# EAGLE board GPS_radiologger_v3 (EAGLE 9.5.1)
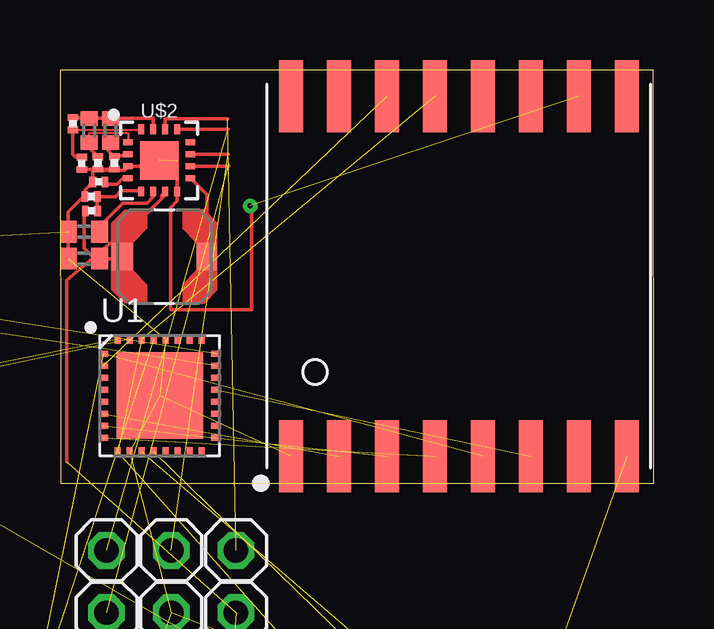
[diagram p0: board, top side]
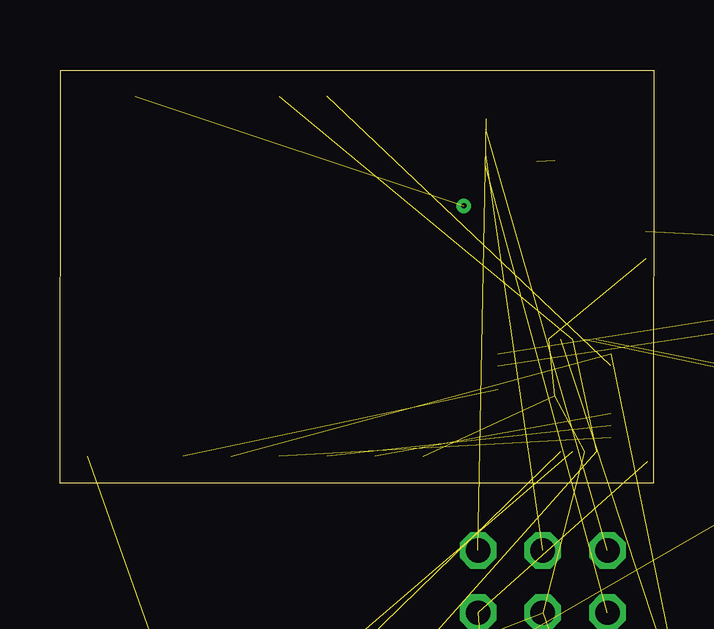
[diagram p1: board, bottom side, seen from below]

Size 24.77 x 17.21 mm. Coordinates in mm from the lower left corner, seen from the top.
Outline: 0.04,0 24.77,0 24.74,17.21 0,17.21 0.04,0
Copper layers (1*16): Top 0.035mm / dielectric 1.5mm / Bottom 0.035mm
Design rules "default": minimum track width 6mil, minimum drill 0.35mm, track to track 6mil, track to pad 6mil, pad to pad 6mil, via to via 6mil, smd to smd 6mil, copper to edge 40mil, drill to drill 6mil, minimum pad ring 10mil, minimum via ring 8mil, stop-mask expansion 4mil, vias tented up to drill 0mil, thermal gap 10mil
Net classes: 0 default: width 0 mm, drill 0 mm; 1 vcc: width 0 mm

## Footprints (pad centres in the part's own frame; a part is rotated, then mirrored left to right if it is on the bottom)
C0402 = smd 0.7 x 0.9: 1 -0.65,0; 2 0.65,0
C0201 = smd 0.25 x 0.35: 1 -0.25,0; 2 0.25,0
0603 = smd 1.1 x 1: 1 -0.85,0; 2 0.85,0
0402 = smd 0.85 x 0.9: 1 -0.58,0; 2 0.58,0
SOD-323 = smd 0.63 x 0.83: A 1.15,0; C -1.15,0
1X04_1.27MM_NO_SILK = drill 0.508 pad 1: 1 0,0; 2 1.27,0; 3 2.54,0; 4 3.81,0
USB-MICROB-PTH-MILL = smd 0.4 x 1.75: D+ 0,0; D- -0.65,0; GND 1.3,0; ID 0.65,0; VBUS -1.3,0 | smd 2 x 1.46: SHIELD -2.9,0.275; SHIELD2 2.9,0.275 | smd 1.425 x 2.5: SHIELD3 -0.963,-2.675; SHIELD4 0.963,-2.675 | smd 1.4 x 2.1 bottom: SHIELD5 -2.731,-2.531; SHIELD7 2.729,-2.531 | smd 1 x 1: SHIELD6 2.7,-2.575 | smd 1.1 x 1.5: SHIELD8 -2.731,-2.731 | smd 1 x 1.3 bottom: SHIELD9 -2.43,0.195; SHIELD10 2.43,0.195
1X01 = drill 1.016 octagon: 1 0,0
IND_LPS4012-103MRB = smd 0.87 x 1.15: 1 -1.765,0; 2 1.765,0
0806 = smd 0.8 x 1.8: 1 -1.3,0; 2 0.5,0
SOT23-3 = smd 0.8 x 0.9: 1 -0.95,-1; 2 0.95,-1; 3 0,1.1
R0201 = smd 0.28 x 0.43: 1 -0.255,0; 2 0.255,0
R0402 = smd 0.6 x 0.7: 1 -0.5,0; 2 0.5,0
QFN-32_SAMD = smd 0.25 x 0.4: GND 0.21,2.31; GNDANA -1.29,-2.39; PA08 -0.79,-2.39; PA09 -0.29,-2.39; PA10 0.21,-2.39; PA11 0.71,-2.39; PA14 1.21,-2.39; PA15 1.71,-2.39; PA27 1.71,2.31; PA28 0.71,2.31; PA30 -1.29,2.31; PA31 -1.79,2.31; RES 1.21,2.31; VDD -1.79,-2.39; VDDCORE -0.29,2.31; VDDIN -0.79,2.31 | smd 0.4 x 0.25: PA00 -2.39,1.71; PA01 -2.39,1.21; PA02 -2.39,0.71; PA03 -2.39,0.21; PA04 -2.39,-0.29; PA05 -2.39,-0.79; PA06 -2.39,-1.29; PA07 -2.39,-1.79; PA16 2.31,-1.79; PA17 2.31,-1.29; PA18 2.31,-0.79; PA19 2.31,-0.29; PA22 2.31,0.21; PA23 2.31,0.71; PA24 2.31,1.21; PA25 2.31,1.71 | smd 3.6 x 3.6: PAD -0.04,-0.04
UBLOX_ZOE_M8-0-10 = smd 0.25 x 0.25: 1 -1.996,2.004; 2 -1.496,2.004; 3 -0.996,2.004; 4 -0.496,2.004; 5 0.004,2.004; 6 0.504,2.004; 7 1.004,2.004; 8 1.504,2.004; 9 2.004,2.004; 10 2.004,1.504; 11 2.004,1.004; 12 2.004,0.504; 13 2.004,0.004; 14 2.004,-0.496; 15 2.004,-0.996; 16 2.004,-1.496; 17 2.004,-1.996; 18 1.504,-1.996; 19 1.004,-1.996; 20 0.504,-1.996; 21 0.004,-1.996; 22 -0.496,-1.996; 23 -0.996,-1.996; 24 -1.496,-1.996; 25 -1.996,-1.996; 26 -1.996,-1.496; 27 -1.996,-0.996; 28 -1.996,-0.496; 29 -1.996,0.004; 30 -1.996,0.504; 31 -1.996,1.004; 32 -1.996,1.504; 33 -0.996,1.004; 34 -0.496,1.004; 35 0.004,1.004; 36 0.504,1.004; 37 1.004,1.004; 38 1.004,0.004; 39 1.004,-0.496; 40 1.004,-0.996; 41 0.504,-0.996; 42 0.004,-0.996; 43 -0.496,-0.996; 44 -0.996,-0.996; 45 -0.996,-0.496; 46 -0.996,0.004; 47 -0.996,0.504; 48 -0.496,0.504; 49 0.504,0.504; 50 0.504,-0.496; 51 -0.496,-0.496
SOT23-6 = smd 0.55 x 1.35: 1 -0.95,-1.375; 2 0,-1.375; 3 0.95,-1.375; 4 0.95,1.375; 5 0,1.375; 6 -0.95,1.375
RFM95/96/97/98W = smd 3 x 1: 3.3V 7.5,1; !RESET -7.5,-3; ANT 7.5,-7; DIO0 7.5,3; DIO1 7.5,5; DIO2 7.5,7; DIO3 7.5,-3; DIO4 7.5,-1; DIO5 -7.5,-5; GND@1 -7.5,7; GND@2 -7.5,-7; GND@3 7.5,-5; MISO -7.5,5; MOSI -7.5,3; NSS -7.5,-1; SCK -7.5,1
SOT23-5 = smd 0.55 x 1.2: 1 -0.95,-1.3; 2 0,-1.3; 3 0.95,-1.3; 4 0.95,1.3; 5 -0.95,1.3
LFCSP-16-3X3 = smd 0.4 x 0.25: 1 -1.3,0.75; 2 -1.3,0.25; 3 -1.3,-0.25; 4 -1.3,-0.75; 9 1.3,-0.75; 10 1.3,-0.25; 11 1.3,0.25; 12 1.3,0.75 | smd 0.25 x 0.4: 5 -0.75,-1.3; 6 -0.25,-1.3; 7 0.25,-1.3; 8 0.75,-1.3; 13 0.75,1.3; 14 0.25,1.3; 15 -0.25,1.3; 16 -0.75,1.3 | smd 1.6 x 1.6: EXP 0,0
CRYSTAL-SMD-3.2X1.5MM = smd 1 x 1.8: P$1 -1.25,0; P$2 1.25,0
W3011 = smd 0.8 x 0.65: 1 1.6,0.475; 2 1.6,-0.475 | smd 0.8 x 1.6: 3 -1.6,0

## Placement (x,y rotation side)
C1  4.7uF  [C0402]  1,9.35 180 top
C2  10uF  [C0402]  1,10.47 180 top
C3  10 uF  [C0201]  -6.38,-21.09 0 top  (outside the outline)
C4  10 uF  [C0201]  -6.38,-25.97 0 top  (outside the outline)
C5  4.7uF  [0603]  -7.24,-71.59 0 top  (outside the outline)
C6  0.1uF  [0603]  -14.81,-75.45 0 top  (outside the outline)
C7  10uF  [0603]  4.07,-54.65 0 top  (outside the outline)
C8  1.0uF  [0402]  7,-54.65 0 top  (outside the outline)
D1  1A/23V/620mV  [SOD-323]  -0.94,-54.65 0 top  (outside the outline)
J4  [1X04_1.27MM_NO_SILK]  -10.21,2.7 180 top  (outside the outline)
J5  [USB-MICROB-PTH-MILL]  -15.33,8.82 90 top  (outside the outline)
JP1  [1X01]  1.94,-2.8 0 top
JP2  [1X01]  4.64,-2.8 0 top
JP3  [1X01]  7.34,-2.8 0 top
JP4  [1X01]  1.94,-5.4 0 top  (outside the outline)
JP5  [1X01]  4.64,-5.4 0 top  (outside the outline)
JP6  [1X01]  7.34,-5.4 0 top  (outside the outline)
L1  22 uH  [IND_LPS4012-103MRB]  4.36,9.44 0 top
L2  2.2uH  [0806]  -14.63,-71.75 0 top  (outside the outline)
Q1  1.1A/60V/600mΩ  [SOT23-3]  0.01,-10.53 0 top  (outside the outline)
Q2  3.1A/30V/105mΩ  [SOT23-3]  3.63,-40.53 0 top  (outside the outline)
R1  6.34M  [R0201]  1.32,11.34 180 top
R2  14.7M  [R0201]  1.3,11.94 0 top
R3  20k  [R0201]  1.62,12.55 0 top
R4  10k  [0402]  -6.3,-59.4 0 top  (outside the outline)
R5  10k  [R0201]  -15.29,-79.49 0 top  (outside the outline)
RPG1  [R0201]  0.54,14.98 90 top
RPG2  [R0201]  0.91,13.33 90 top
RSD1  [R0402]  1.21,14.69 90 top
RSD2  [R0201]  1.58,13.34 90 top
RTERM1  [R0402]  2.12,14.69 90 top
RTERM2  [R0201]  2.27,13.34 90 top
U1  ATSAMD21E18A-U  [QFN-32_SAMD]  4.2,3.69 0 top
U2  UBLOX_ZOE_M8-0-10  [UBLOX_ZOE_M8-0-10]  17.78,-11.73 0 top  (outside the outline)
U3  TPL5110  [SOT23-6]  0.26,-16.47 0 top  (outside the outline)
U4  RFM95W  [RFM95/96/97/98W]  16.63,8.63 90 top
U5  3.3V  [SOT23-5]  -5.8,-55.73 0 top  (outside the outline)
U$2  ADP5090  [LFCSP-16-3X3]  4.14,13.44 0 top
Y1  32.768kHz  [CRYSTAL-SMD-3.2X1.5MM]  -11.24,-71.88 0 top  (outside the outline)
Y2  W3011  [W3011]  -5.7,16.61 180 top  (outside the outline)

## Library data of the parts
C1 C2 R1-R3 RPG1 RPG2 RSD2 RTERM2 = resistor
C3 C4 = rcl; SPICEPREFIX: C
C5 = SparkFun-Capacitors; PROD_ID: CAP-08280
C6 = SparkFun-Capacitors; PROD_ID: CAP-00810
C7 = SparkFun-Capacitors; PROD_ID: CAP-11015
C8 = SparkFun-Capacitors; PROD_ID: CAP-12417
D1 = SparkFun-DiscreteSemi; PROD_ID: DIO-11623
J4 = SparkFun-Connectors
J5 = SparkFun-Connectors; PROD_ID: CONN-13711
JP1-JP6 = pinhead
L1 = LPS4012-103MRB; AVAILABILITY: Unavailable; DESCRIPTION: Power inductor, shielded, 20/30% tol, SMT, RoHS, lead-free, halogen-free; MF: Coilcraft; MP: LPS4012-103MRB; PACKAGE: None; PRICE: None
L2 = SparkFun-Coils; PROD_ID: NDUC-14257
Q1 = SparkFun-DiscreteSemi; PROD_ID: TRANS-08285
Q2 = SparkFun-DiscreteSemi; PROD_ID: TRANS-11308
R4 = SparkFun-Resistors; PROD_ID: RES-14241
R5 RSD1 RTERM1 = rcl; SPICEPREFIX: R
U1 = SparkFun-IC-Microcontroller; PROD_ID: IC-14428
U2 = SparkFun-GPS; PROD_ID: IC-14251
U3 = SparkFun-IC-Power; PROD_ID: IC-14387
U4 = SparkFun-RF; PROD_ID: IC-13959
U5 = SparkFun-IC-Power; PROD_ID: VREG-12457
U$2 = ADP5090_LFCSP-16-3X3
Y1 = SparkFun-Clocks; PROD_ID: XTAL-13062
Y2 = SparkFun-GPS; PROD_ID: ANT-14304

## Nets
3.3V: C3.1 C6.1 C7.1 C8.1 R5.2 U1.VDD U1.VDDIN U2.24 U2.25 U4.3.3V U5.5
!INT: U2.43
!RESET: J4.1 U2.20
!SAFEBOOT: U2.34
ANT: U2.4
BAT: JP4.1 U$2.10
D7: U1.PA04
D13: U1.PA10
D+: J5.D+ U1.PA25
D-: J5.D- U1.PA24
D_SEL: U2.48
DAC: U1.PA02
DELAY/M_DRIVE: U3.3
DIS_SW: JP3.1 U$2.14
DONE: U3.4
DRIVE: Q1.1 U3.5
FLASH_CS: U1.PA19
FLASH_MISO: U1.PA18
FLASH_MOSI: U1.PA16
FLASH_SCK: U1.PA17
GND: C1.2 C2.2 C3.2 C4.2 C5.2 C6.2 C7.2 C8.2 J4.2 J5.GND J5.SHIELD J5.SHIELD2 J5.SHIELD3 J5.SHIELD4 J5.SHIELD5 J5.SHIELD6 J5.SHIELD7 J5.SHIELD8 J5.SHIELD9 J5.SHIELD10 JP5.1 R2.1 R3.1 R4.1 RPG2.1 RSD2.1 RTERM2.1 U1.GND U1.GNDANA U1.PAD U2.1 U2.3 U2.5 U2.7 U2.8 U2.9 U2.10 U2.11 U2.12 U2.17 U2.23 U2.29 U2.31 U2.37 U2.38 U2.39 U2.40 U2.41 U2.44 U2.46 U2.47 U2.49 U3.2 U4.GND@1 U4.GND@2 U4.GND@3 U5.2 U$2.3 U$2.8 U$2.EXP
MISO: U1.PA05 U4.MISO
MOSI: U1.PA06 U4.MOSI
N$1: R1.1 R2.2 U$2.5
N$2: C2.1 U$2.6
N$3: L1.2 U$2.9
N$4: L2.2 U2.26
N$5: R3.2 U$2.4
N$6: U3.1 U3.6
N$7: RTERM1.1 RTERM2.2 U$2.2
N$8: RPG1.1 RPG2.2 U$2.16
N$9: RSD1.1 RSD2.2 U$2.1
N$10: C4.1 U1.VDDCORE
N$11: RPG1.2 RSD1.2 RTERM1.2 U$2.15
N$13: C5.1 L2.1 U2.27
N$14: U2.18 Y1.P$2
N$15: U2.19 Y1.P$1
PGOOD: JP1.1 U$2.13
RESET: U1.RES
RFM_ANT: U4.ANT
RFM_CS: R5.1 U1.PA00 U4.NSS
RFM_INT: U1.PA01 U4.DIO0
RFM_RST: U1.PA22 U4.!RESET
RX: U1.PA23
RXI/MOSI: U2.22
SCK: U1.PA07 U4.SCK
SCL: U1.PA09 U2.32
SDA: U1.PA08 U2.2
SWCLK: J4.3 U1.PA30
SWDIO: J4.4 U1.PA31
SYS: JP2.1 U$2.11
TIMEPULSE: U2.33
TXO/MISO: U2.21
V_BATT: Q2.3 U2.16
V_USB: D1.A J5.VBUS Q2.1 R4.2
VDD: Q1.2
VDD_OUT: Q1.3
VIN: C1.1 D1.C JP6.1 L1.1 Q2.2 R1.2 U5.1 U5.3 U$2.7

## Tracks (layer width: path | path; a pad name or v marks a point on that pad's centre or on a via)
3.3V  (10 unrouted)
!RESET  (1 unrouted)
BAT  (1 unrouted)
  Top 0.152: U$2.10 7.04,13.19 7.04,13.24
D+  (1 unrouted)
D-  (1 unrouted)
DIS_SW  (1 unrouted)
  Top 0.152: U$2.14 4.39,15.17 6.99,15.17
DRIVE  (1 unrouted)
GND  (via drill 0.2)  (34 unrouted)
  Top 0.152: 4.89,13.41 U$2.8 4.89,11.76 4.61,11.48 4.61,7.22 7.98,7.22 7.98,11.55 v7.93,11.55 | U$2.EXP 4.42,13.44 4.42,13.19 U$2.3 2.69,13.05 1.34,13.05 1.3,13.09 RTERM2.1 2.25,13.07 RPG2.1 | C1.2 C2.2 0.35,11.32 0.96,11.93 0.98,11.93 0.99,11.94 R2.1 1.04,12.23 R3.1 1.36,13.07 RPG2.1 | RSD2.1 1.57,13.07 RPG2.1
MISO  (1 unrouted)
MOSI  (1 unrouted)
N$1
  Top 0.152: U$2.5 3.36,12.17 2.56,12.17 2.32,11.94 R2.2 1.55,11.36 R1.1
N$2
  Top 0.152: U$2.6 3.89,11.93 3.63,11.66 2.61,11.66 1.65,10.7 C2.1
N$3
  Top 0.152: U$2.9 6.12,12.01 L1.2
N$4  (1 unrouted)
N$5
  Top 0.152: R3.2 1.97,12.46 2.39,12.46 2.62,12.69 U$2.4
N$6  (1 unrouted)
N$7
  Top 0.152: U$2.2 2.66,13.69 2.62,13.65 2.32,13.65 RTERM2.2 2.02,13.85 2.02,14.09 RTERM1.1
N$8
  Top 0.076: RPG1.1 3.39,14.72
  Top 0.152: RPG1.1 0.54,13.69 0.64,13.59 0.9,13.59 RPG2.2 | 3.39,14.72 U$2.16
N$9
  Top 0.076: RSD1.1 1.21,14.59 2.84,14.59 U$2.1
  Top 0.152: RSD1.1 1.19,14.17 1.19,13.99 RSD2.2
N$10  (1 unrouted)
N$11
  Top 0.152: 2.11,14.95 RTERM1.2 | 0.59,15.18 RPG1.2 1.21,15.23 RSD1.2 RTERM1.2 | RTERM1.2 2.15,15.21 3,15.21 | 3,15.21 3,15.22 | 3,15.21 3.89,15.21 U$2.15 | RTERM1.2
N$13  (2 unrouted)
N$14  (1 unrouted)
N$15  (1 unrouted)
PGOOD  (1 unrouted)
  Top 0.152: U$2.13 7.01,14.74 | 7.01,14.74
RFM_CS  (2 unrouted)
RFM_INT  (1 unrouted)
RFM_RST  (1 unrouted)
SCK  (1 unrouted)
SCL  (1 unrouted)
SDA  (1 unrouted)
SWCLK  (1 unrouted)
SWDIO  (1 unrouted)
SYS  (1 unrouted)
  Top 0.152: U$2.11 7.01,13.69 7.01,13.7
V_BATT  (1 unrouted)
V_USB  (3 unrouted)
VIN  (5 unrouted)
  Top 0.152: 2.6,10.59 L1.1 | L1.1 2.6,8.19 | L1.1 2.6,10.2 4.24,11.85 4.24,12 U$2.7 4.39,11.99 3.99,11.59 0.27,8.46 0.27,0.89 | L1.1 2.6,8.09 | L1.1 2.5,9.35 C1.1 1.45,9.35 1,9.79 1,11.28 R1.2